# EAGLE board DC_Sensor_ESP8266_ADC_NC_01_PLATE (EAGLE 7.5.0)
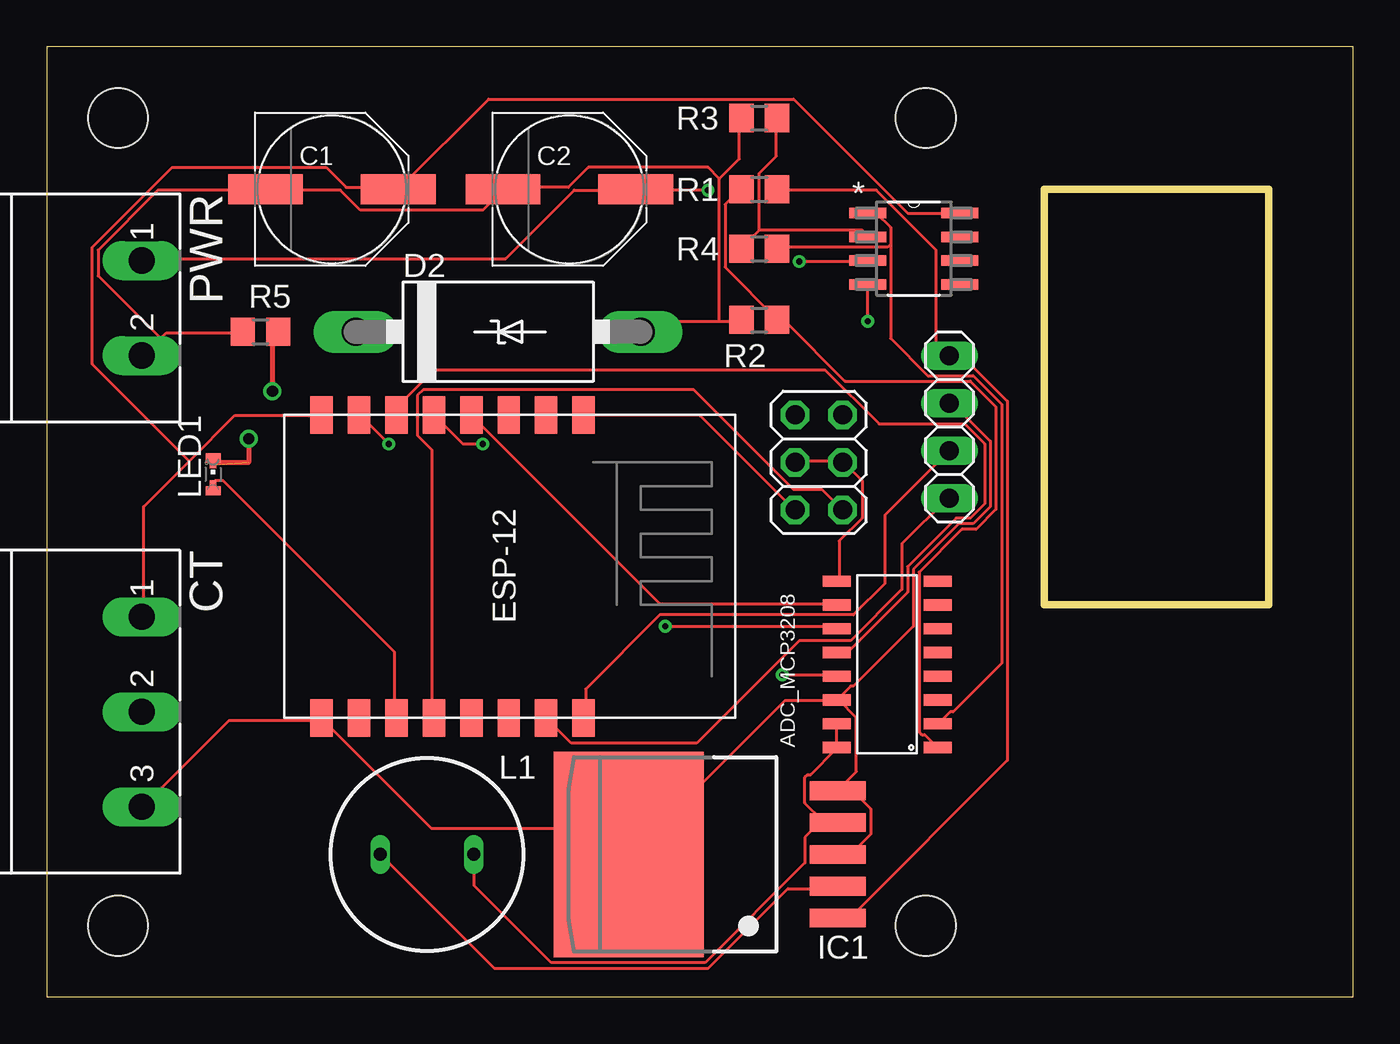
[diagram p0: board, top side]
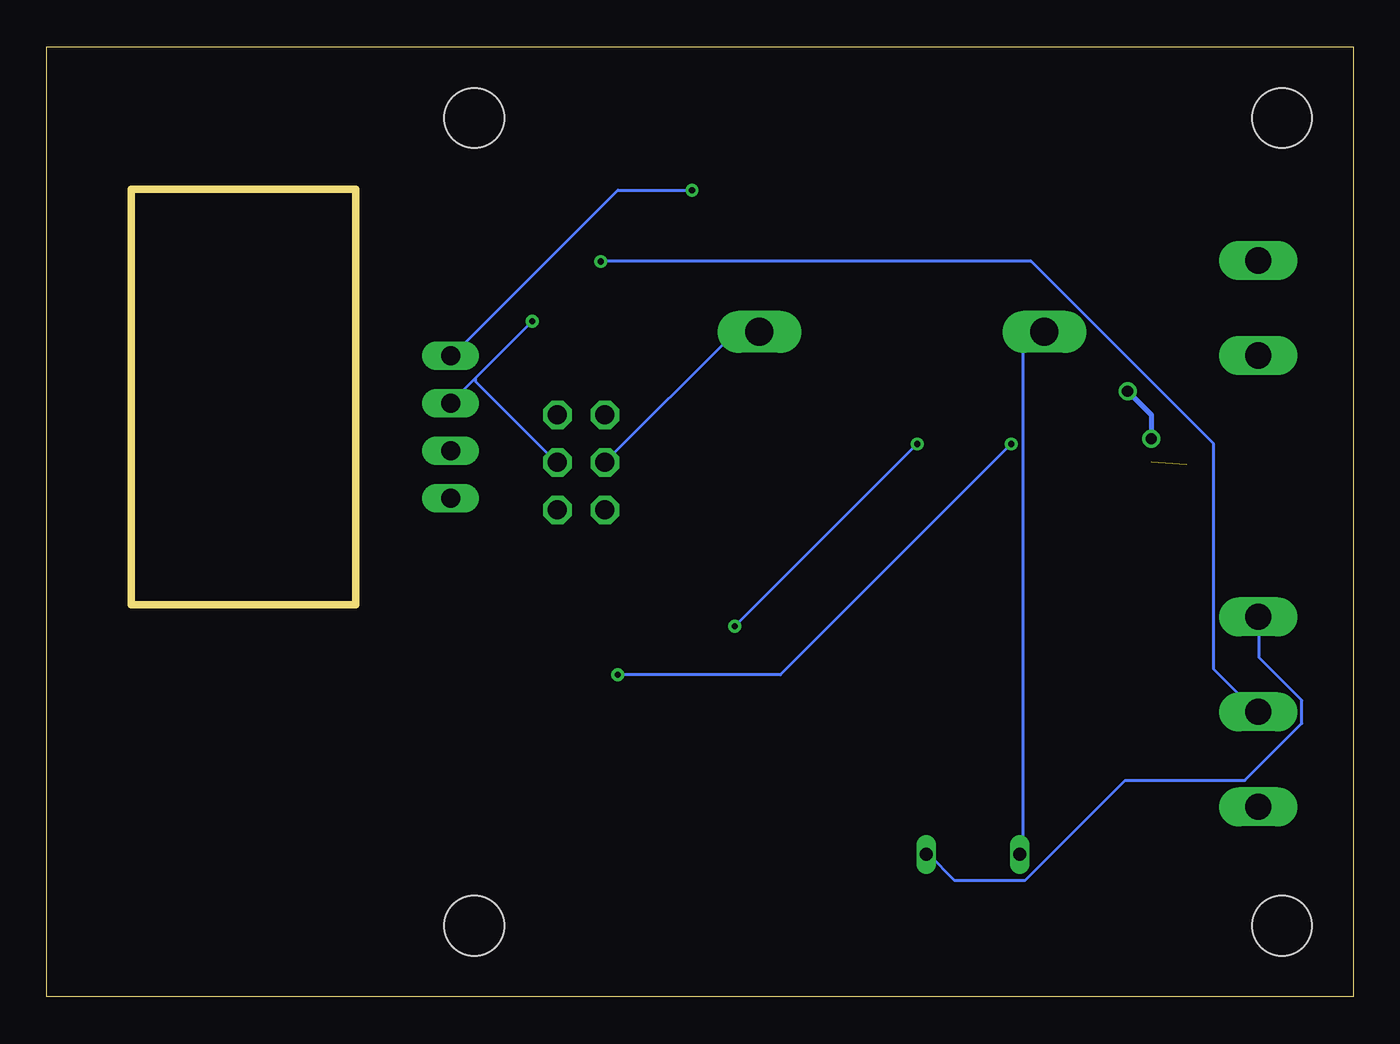
[diagram p1: board, bottom side, seen from below]

Size 69.85 x 50.8 mm. Coordinates in mm from the lower left corner, seen from the top.
Outline: 0,0 69.85,0 69.85,50.8 0,50.8 0,0
Outline: 53.34,43.18 65.33,43.18 65.33,20.95 53.34,20.95 53.34,43.18
Copper layers (1*16): Top 0.0356mm / dielectric 1.5011mm / Bottom 0.0356mm
Design rules "LaenPCBOrder": minimum track width 6mil, minimum drill 13mil, track to track 6mil, track to pad 6mil, pad to pad 6mil, via to via 6mil, smd to smd 6mil, copper to edge 15mil, drill to drill 6mil, minimum pad ring 7mil, minimum via ring 7mil, stop-mask expansion 3mil, vias tented up to drill 0mil, thermal gap 10mil
Holes 3.2 mm at 3.81,46.99 46.99,46.99 46.99,3.81 3.81,3.81

## Footprints (pad centres in the part's own frame; a part is rotated, then mirrored left to right if it is on the bottom)
PDIP16 = smd 0.6 x 1.5: P$1 0,0; P$2 1.27,0; P$3 2.54,0; P$4 3.81,0; P$5 5.08,0; P$6 6.35,0; P$7 7.62,0; P$8 8.89,0; P$9 8.89,5.4; P$10 7.62,5.4; P$11 6.35,5.4; P$12 5.08,5.4; P$13 3.81,5.4; P$14 2.54,5.4; P$15 1.27,5.4; P$16 0,5.4
PANASONIC_F = smd 4 x 1.6: + 3.55,0; - -3.55,0
MSTBA3 = drill 1.397 long: 1 -5.08,5.08; 2 0,5.08; 3 5.08,5.08
C4111-15 = drill 1.499 long: A 7.62,0; C -7.62,0
TO263-5 = smd 1 x 3: 1 -3.4,-8; 2 -1.7,-8; 3 0,-8; 4 1.7,-8; 5 3.4,-8 | smd 11 x 8: TAB 0,3.175
1X04 = drill 1.016 long: 1 -3.81,0; 2 -1.27,0; 3 1.27,0; 4 3.81,0
BS11 = drill 0.7 long: 1 -2.5,0; 2 2.5,0
CHIPLED-0603-TTW = smd 0.8 x 0.5: A 0,-0.875; C 0,0.875 | smd 0.35 x 0.35: A@1 0,-0.5; C@1 0,0.5
ESP8266-ESP12 = smd 2 x 1.2: 1 0,16; 2 0,14; 3 0,12; 4 0,10; 5 0,8; 6 0,6; 7 0,4; 8 0,2; 9 16.2,2; 10 16.2,4; 11 16.2,6; 12 16.2,8; 13 16.2,10; 14 16.2,12; 15 16.2,14; 16 16.2,16
MSTBA2 = drill 1.397 long: 1 -2.54,5.08; 2 2.54,5.08
R0805 = smd 1.3 x 1.5: 1 -0.95,0; 2 0.95,0
2X03 = drill 1.016 octagon: 1 -2.54,-1.27; 2 -2.54,1.27; 3 0,-1.27; 4 0,1.27; 5 2.54,-1.27; 6 2.54,1.27
SOIC127P600X175-8N = smd 1.981 x 0.559: 1 -2.464,1.905; 2 -2.464,0.635; 3 -2.464,-0.635; 4 -2.464,-1.905; 5 2.464,-1.905; 6 2.464,-0.635; 7 2.464,0.635; 8 2.464,1.905

## Placement (x,y rotation side)
ADC_MCP3208  [PDIP16]  47.62,13.34 90 top
C1  1000uF  [PANASONIC_F]  15.24,43.18 0 top
C2  100uF  [PANASONIC_F]  27.94,43.18 0 top
CT  MSTBA3  [MSTBA3]  0,15.24 270 top
D2  1N5822  [C4111-15]  24.13,35.56 0 top
IC1  [TO263-5]  34.29,7.62 90 top
JP1  IO  [1X04]  48.26,30.48 90 top
L1  100uH  [BS11]  20.32,7.62 0 top
LED1  [CHIPLED-0603-TTW]  8.89,27.94 0 top
MDL1  [ESP8266-ESP12]  12.7,31.11 270 top
PWR  MSTBA2  [MSTBA2]  0,36.83 270 top
R1  1M  [R0805]  38.1,43.18 0 top
R2  90k  [R0805]  38.1,36.2 0 top
R3  1M  [R0805]  38.1,46.99 0 top
R4  1M  [R0805]  38.1,40.01 0 top
R5  1k  [R0805]  11.43,35.56 0 top
SV1  RESET  [2X03]  41.27,28.57 90 top
U1  TLV272CDG4  [SOIC127P600X175-8N]  46.35,40.01 0 top

## Library data of the parts
ADC_MCP3208 = MCP3208
C1 C2 R1-R5 = rcl
CT = con-phoenix-508; MF: FARNELL; MPN: 1757255; OC_FARNELL: 3705183; OC_NEWARK: 71C4162
D2 = diode
IC1 = AWJLEagleLib
JP1 SV1 = pinhead
L1 = inductor-neosid; OC_FARNELL: unknown; OC_NEWARK: unknown
LED1 = led
MDL1 = ESP8266-ESP12
PWR = con-phoenix-508; MF: FARNELL; MPN: 1757242; OC_FARNELL: 3705171; OC_NEWARK: 71C4161
U1 = Texas Instruments_By_element14_Batch_1; MPN: TLV272CDG4; OC_FARNELL: 1234856; OC_NEWARK: 13M5572; PACKAGE: SOIC-8; SUPPLIER: TI; TYPE: OPAMP

## Nets
3.3V: ADC_MCP3208.P$15 ADC_MCP3208.P$16 C1.+ CT.1 IC1.4 L1.2 MDL1.8 U1.8
CT_SIG: CT.2 U1.3
CT_SIG_AMPLIFIED: ADC_MCP3208.P$2 R4.2 U1.1
GND: ADC_MCP3208.P$9 ADC_MCP3208.P$14 C1.- C2.- CT.3 D2.A IC1.3 IC1.5 IC1.TAB JP1.3 MDL1.9 PWR.2 R2.1 R3.1 R5.1 SV1.3 SV1.4 U1.4
GPIO0: MDL1.12 SV1.1
GPIO12: ADC_MCP3208.P$12 MDL1.6
GPIO13: ADC_MCP3208.P$13 MDL1.7
GPIO14: ADC_MCP3208.P$11 MDL1.5
GPIO16: ADC_MCP3208.P$10 MDL1.4
N$1: LED1.A@1 MDL1.11
N$2: R3.2 R4.1 U1.2
N$3: LED1.C@1 R5.2
N$4: D2.C IC1.2 L1.1
RESET: MDL1.1 SV1.2
RXD: JP1.1 MDL1.15
TXD: JP1.2 MDL1.16
VIN: C2.+ IC1.1 JP1.4 PWR.1 R1.2
VSENSE: ADC_MCP3208.P$1 R1.1 R2.2

## Tracks (layer width: path | path; a pad name or v marks a point on that pad's centre or on a via)
3.3V
  Top 0.152: U1.8 46.02,41.91 39.93,48.01 23.62,48.01 18.9,43.28 C1.+ 18.75,43.28 16,43.28 14.94,44.35 6.71,44.35 2.44,40.08 2.44,33.83 7.62,28.65 | 7.62,28.65 5.18,26.21 5.18,20.42 CT.1 | 7.62,28.65 10.06,31.09 14.63,31.09 MDL1.8 | ADC_MCP3208.P$15 42.22,14.48 42.22,13.41 ADC_MCP3208.P$16 42.22,13.26 40.84,11.89 40.69,11.89 40.54,11.73 40.54,10.36 41.45,9.45 | 41.45,9.45 42.22,9.45 IC1.4 41.45,9.45 | 41.45,9.45 40.54,8.53 40.54,7.16 35.2,1.83 26.98,1.83 22.86,5.94 22.86,7.62 L1.2
  Bottom 0.152: CT.1 5.03,20.27 5.03,18.14 2.74,15.85 2.74,14.63 5.79,11.58 12.19,11.58 17.53,6.25 21.34,6.25 22.71,7.62 L1.2
CT_SIG  (via drill 0.33)
  Top 0.152: v40.23,39.32 43.89,39.32 U1.3
  Bottom 0.152: v40.23,39.32 17.22,39.32 7.47,29.57 7.47,17.53 5.18,15.24 CT.2
CT_SIG_AMPLIFIED
  Top 0.152: 45.11,40.23 44.96,40.08 39.17,40.08 R4.2 | 45.11,40.23 45.11,41.15 44.35,41.91 U1.1 | 45.11,40.23 45.11,35.2 47.09,33.22 49.53,33.22 51.05,31.7 51.05,17.83 48.46,15.24 48.31,15.24 47.7,14.63 ADC_MCP3208.P$2
GND  (via drill 0.33)
  Top 0.152: CT.3 5.18,10.21 9.75,14.78 14.63,14.78 MDL1.9 14.78,14.78 20.57,8.99 29.72,8.99 31.09,7.62 IC1.TAB 31.24,7.62 39.47,15.85 42.22,15.85 ADC_MCP3208.P$14 | 42.67,11.43 42.37,11.12 IC1.5 42.67,11.43 | 42.67,11.43 43.28,12.04 43.28,14.94 42.37,15.85 ADC_MCP3208.P$14 | IC1.3 42.98,7.62 44.04,8.69 44.04,10.06 42.67,11.43 | 6.1,35.2 5.18,34.29 PWR.2 6.1,35.2 | 6.1,35.2 6.4,35.51 10.36,35.51 R5.1 | 6.1,35.2 2.74,38.56 2.74,39.93 5.94,43.13 11.58,43.13 C1.- 11.73,43.13 15.7,43.13 16.76,42.06 23.32,42.06 24.38,43.13 C2.- 24.54,43.28 27.89,43.28 28.96,44.35 35.36,44.35 35.97,43.74 | 35.97,36.12 32.31,36.12 D2.A | 35.97,36.12 37.03,36.12 R2.1 | 35.97,43.74 37.03,44.81 37.03,46.94 R3.1 | 35.97,36.12 35.97,43.74 | ADC_MCP3208.P$9 42.37,22.25 42.37,24.38 43.59,25.6 43.59,27.58 42.67,28.5 SV1.3 42.52,28.65 40.08,28.65 SV1.4 | v43.89,36.12 U1.4 | ADC_MCP3208.P$14 42.37,16 42.98,16.61 43.13,16.61 46.33,19.81 46.33,22.86 48.77,25.3 49.53,25.3 50.44,26.21 50.44,29.72 48.31,31.85 JP1.3
  Bottom 0.152: JP1.3 46.94,33.07 | 46.94,33.07 v43.89,36.12 | 46.94,33.07 46.94,32.92 42.67,28.65 SV1.3 | SV1.4 33.07,35.51 31.85,35.51 D2.A
GPIO0
  Top 0.152: SV1.1 41.45,27.13 39.93,27.13 34.59,32.46 20.12,32.46 19.81,32.16 19.81,30.02 20.57,29.26 20.57,14.94 MDL1.12
GPIO12
  Top 0.152: ADC_MCP3208.P$12 42.37,18.44 42.82,18.44 46.02,21.64 46.02,23.01 48.62,25.6 49.38,25.6 50.14,26.36 50.14,29.57 49.07,30.63 44.5,30.63 41.6,33.53 20.73,33.53 18.75,31.55 18.75,31.24 MDL1.6
GPIO13  (via drill 0.33)
  Top 0.152: v39.32,17.22 42.22,17.22 ADC_MCP3208.P$13 | v18.29,29.57 16.76,31.09 MDL1.7
  Bottom 0.152: v39.32,17.22 30.63,17.22 v18.29,29.57
GPIO14  (via drill 0.33)
  Top 0.152: v33.07,19.81 42.22,19.81 ADC_MCP3208.P$11 | v23.32,29.57 22.25,29.57 20.73,31.09 MDL1.5
  Bottom 0.152: v23.32,29.57 v33.07,19.81
GPIO16
  Top 0.152: ADC_MCP3208.P$10 42.22,21.03 32.77,21.03 22.71,31.09 MDL1.4
N$1
  Top 0.152: LED1.A@1 8.99,27.58 9.45,27.58 18.59,18.44 18.59,14.94 MDL1.11
N$2
  Top 0.152: 38.1,41 37.19,40.08 R4.1 | 38.1,41 43.59,41 43.89,40.69 U1.2 | 38.1,41 38.1,44.04 39.01,44.96 39.01,46.94 R3.2
N$3  (via drill 0.6)  (1 unrouted)
  Top 0.254: v10.79,29.84 10.79,28.57 8.89,28.57 | v12.06,32.38 12.06,35.56 R5.2
  Bottom 0.254: v10.79,29.84 10.79,31.11 v12.06,32.38
N$4
  Top 0.152: IC1.2 42.22,5.79 39.62,5.79 35.36,1.52 23.93,1.52 L1.1
  Bottom 0.152: L1.1 17.68,7.62 17.68,34.44 16.61,35.51 D2.C
RESET
  Top 0.152: MDL1.1 28.8,31.09 34.9,31.09 39.93,26.06 SV1.2
RXD
  Top 0.152: MDL1.15 26.82,14.78 28.04,13.56 34.75,13.56 40.23,19.05 42.98,19.05 45.72,21.79 45.72,24.23 48.16,26.67 JP1.1
TXD
  Top 0.152: JP1.2 44.81,25.76 44.81,22.1 43.13,20.42 32.77,20.42 28.8,16.46 28.8,14.94 MDL1.16
VIN  (via drill 0.33)
  Top 0.152: PWR.1 5.18,39.47 24.54,39.47 28.19,43.13 31.39,43.13 C2.+ 31.55,43.13 v35.36,43.13 | R1.2 39.17,43.13 44.35,43.13 47.55,39.93 47.55,34.9 48.16,34.29 JP1.4 48.92,34.29 51.36,31.85 51.36,12.65 42.98,4.27 42.37,4.27 IC1.1
  Bottom 0.152: v35.36,43.13 39.32,43.13 48.16,34.29 JP1.4
VSENSE
  Top 0.152: R1.1 37.03,43.13 36.27,42.37 36.27,39.01 39.01,36.27 R2.2 39.17,36.12 39.47,36.12 42.67,32.92 49.38,32.92 50.75,31.55 50.75,26.06 49.68,24.99 48.92,24.99 46.63,22.71 46.63,14.17 46.79,14.02 46.94,14.02 ADC_MCP3208.P$1

## Text on the board
Document: GND | GND | GND